# Altium PCB Audio-Module.PcbDoc
Units mm, origin at the board's own origin, x right, y up, seen from the top; angles counter-clockwise.
Board outline 29.75 x 31.25 mm, 2 copper layers (Top Layer, Bottom Layer); 8 components, 6 nets, 32 pads, 4 vias.
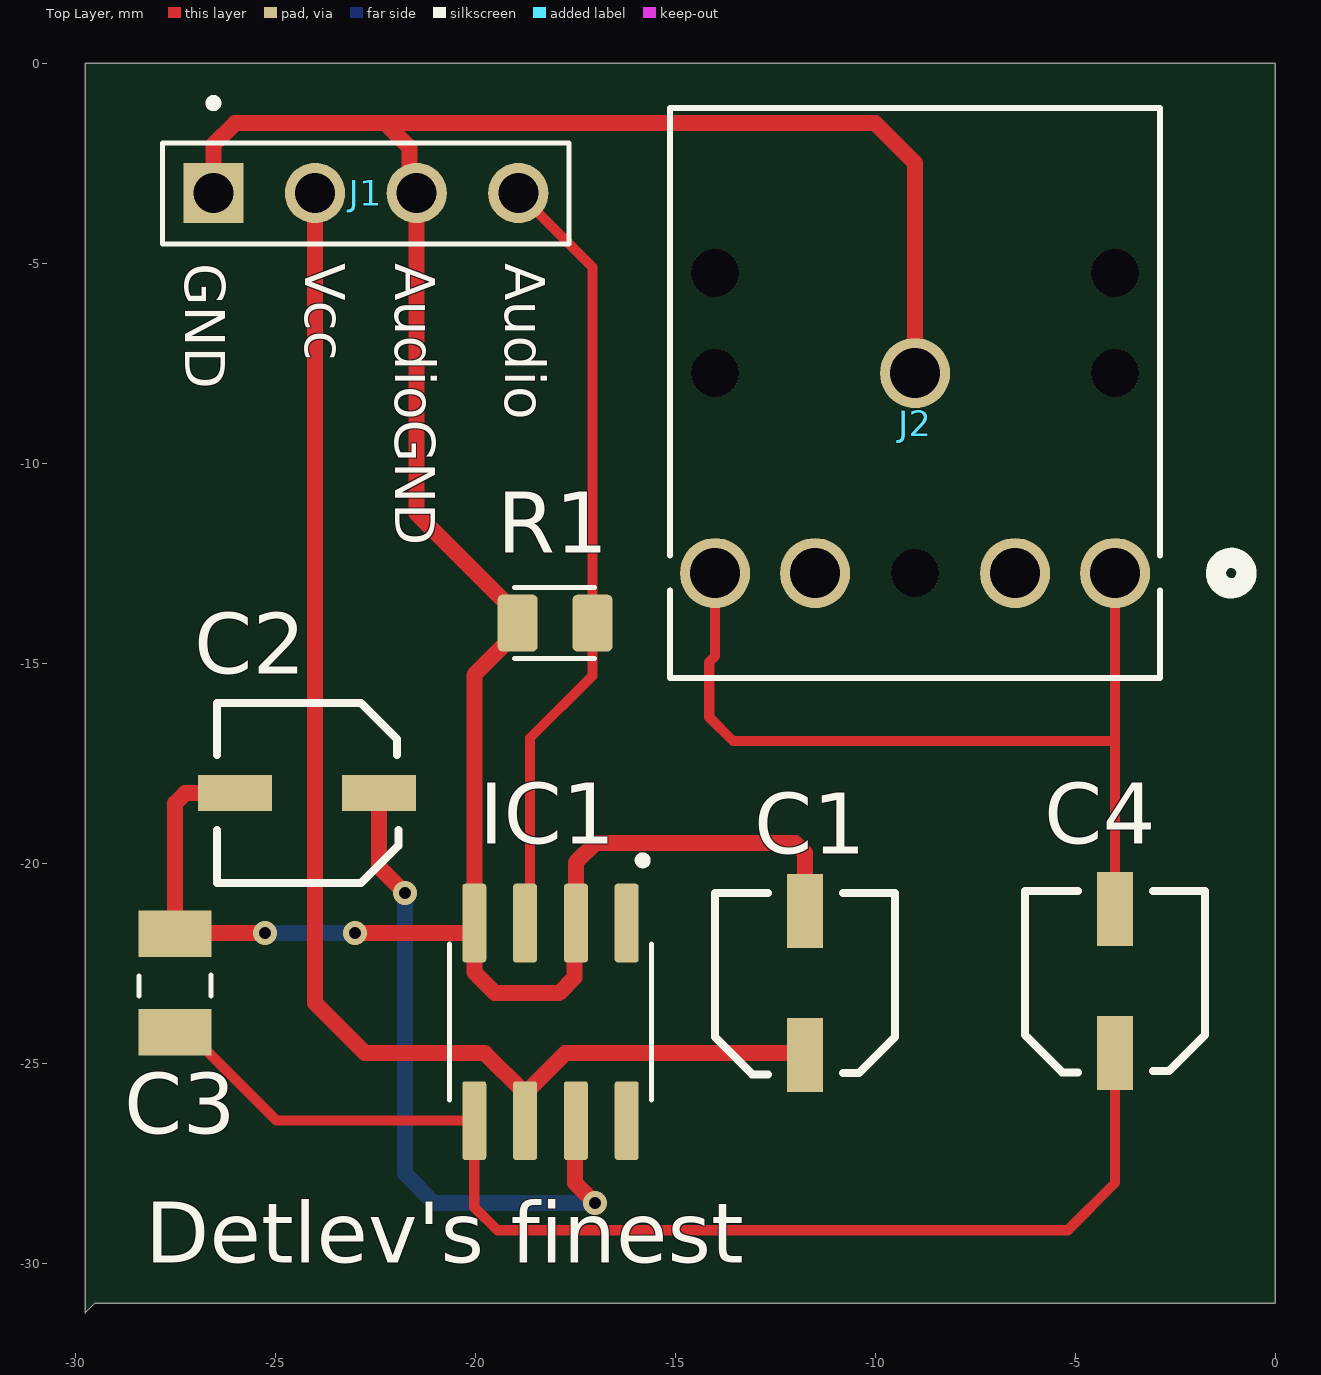
[diagram p0: Top Layer view]
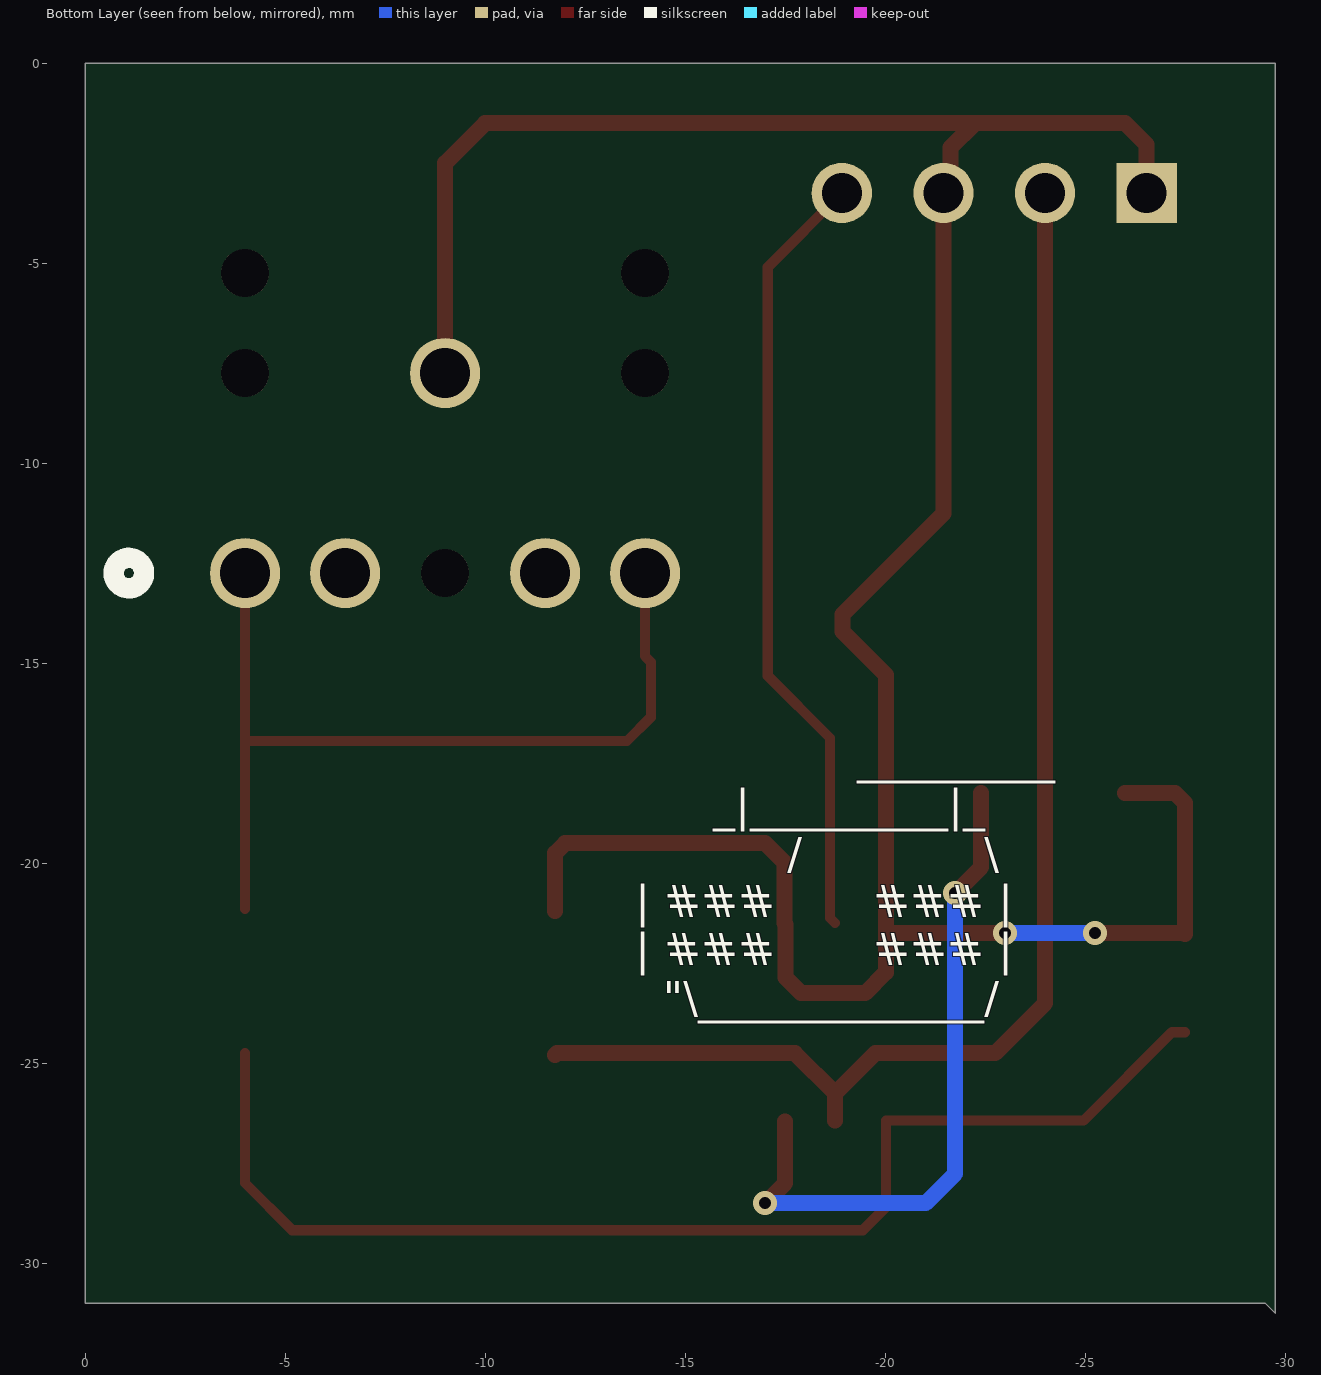
[diagram p1: Bottom Layer view, seen from below]
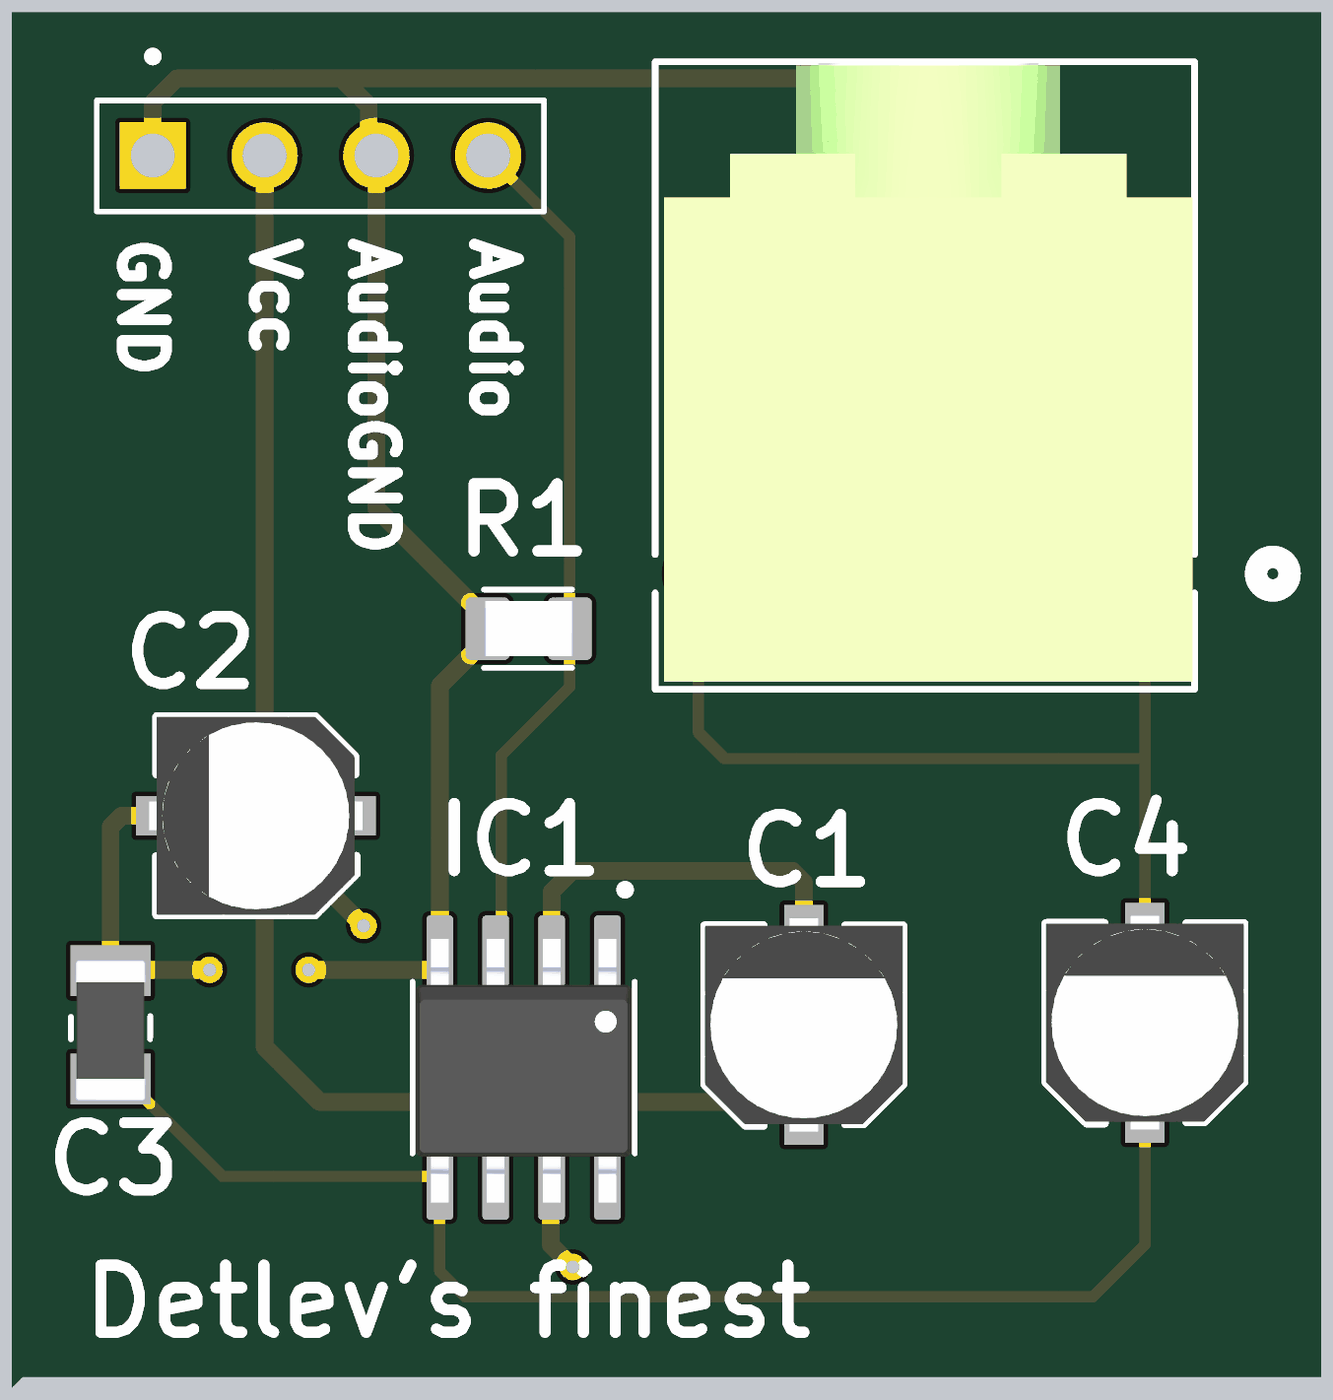
[diagram p2: 3D render of the assembled board from above, using the file's embedded part models]

## Layer stack, top to bottom
Top Solder: solder mask 0.0102, Solder Resist, Dk 3.5
Top Layer: signal copper 0.0356
Dielectric 1: dielectric 0.32, FR-4, Dk 4.8
Bottom Layer: signal copper 0.0356
Bottom Solder: solder mask 0.0102, Solder Resist, Dk 3.5

## Board outline
0,0 -29.75,0 -29.75,-31.25 -29.5,-31 0,-31

## Design rules (kind name [scope] priority, off if disabled: settings)
Clearance [All] p1: gap=0.254 ignorepadtopadclearanceinfootprint=FALSE except(0: Arc-Hole Track-Hole SMDPad-Hole THPad-Hole Via-Hole Fill-Hole Poly-Hole Region-Hole Text-Hole)
PolygonConnect [All] p1: connectstyle=Relief reliefconductorwidth=0.254 reliefentries=4 polygonreliefangle="90 Angle" airgapwidth=0.254
RoomDefinition Audio-Module-SCH [InComponentClass('Audio-Module-SCH')] p1: confinementstyle=ConfineIn formatcopy=TRUE lockcomponents=FALSE outline -29.75,-31 0,-31 0,0 -29.75,0
RoutingVias [All] p1: holewidth=0.711 width=1.27 viastyle="Through Hole" minholewidth=0.711 minwidth=1.27 maxholewidth=0.711 maxwidth=1.27
SilkToSolderMaskClearance [IsPad] p1: minsilkscreentomaskgap=0.1 clearancetoexposedcopper=TRUE
SolderMaskExpansion [All] p1: expansion=0.102 istentingtop=FALSE
Width [All] p1: maxlimit=0.5 minlimit=0.254 preferedwidth=0.254
29 further rules are at their usual default settings.

## Components (designator, comment, footprint, x,y, rotation, side; value= is the part's Value field where it differs from the comment)
C1 "100µF" ELCO -11.75,-23 r90 top
C2 "100µF" ELCO -24.2,-18.25 r180 top
C3 "100nF" "CAPACITOR 1206" -27.5,-23 r90 top
C4 "1000µF" ELCO -4,-22.95 r90 top
IC1 "LM386" "LM386 SOP8" -16.21,-21.5 r270 top
J1 "4 pin header" "4 HDR" -22.73,-3.25 r0 top
J2 "2.5mm Audio Jack" "AUDIO JACK" -4,-12.75 r180 top
R1 "10K" "RESISTOR 0805" -18,-14 r180 top

## Footprints (in the part's own frame and the unit in brackets; to place one, negate y for a bottom-side part, rotate by r counter-clockwise, add the part's x,y. Pads: shape width x height; smd on the part's side, far side on the other; paste and mask are expansions set on the pad)
"4 HDR" [mm] "1x4 pin header"
  rect 1.508x1.508 hole 1: 1(-3.81,0)
  round 1.508 hole 1: 2(-1.27,0) 3(1.27,0) 4(3.81,0)
  silkscreen extent -5.08,-1.27 5.08,2.35
"AUDIO JACK" [mil] "3.5mm audio jack"
  round 69 hole 49: 1(0,0) 2(98.43,0) 3(295.28,0) 4(393.7,0) 5(196.85,-196.85)
  round 47 hole 47 unplated mask+0: 6(196.85,0)
  round 47 hole 47 unplated: 7(0,-196.85) 8(393.7,-196.85) 9(0,-295.28) 10(393.7,-295.28)
  silkscreen extent -129,-458 438,103, body extent -42,-457 430,97, height 236
"CAPACITOR 1206" [mm] "100nF & 4.7pF"
  rect 1.16x1.82 smd: 1(-1.23,0) 2(1.23,0)
  silkscreen extent -0.32,-0.9 0.2,0.9, body extent -1.73,-0.8 1.47,0.8, height 0.85
ELCO [mm] "ELCO CAP"
  rect 1.85x0.9 smd: 1(-1.8,0) 2(1.8,0)
  silkscreen extent -2.28,-2.25 2.26,2.25, body extent -2.42,-2.25 2.42,2.25, height 6.1
"LM386 SOP8" [mm] "LM368 SOP8 package"
  rrect25% 1.97x0.6 smd: 1(0,0) 2(0,-1.27) 3(0,-2.54) 4(0,-3.81) 5(4.94,-3.81) 6(4.94,-2.54) 7(4.94,-1.27) 8(4.94,0)
  silkscreen extent -1.67,-4.43 4.42,0.62, body extent -0.46,-4.36 5.54,0.55, height 1.75
"RESISTOR 0805" [mm]
  rrect25% 1x1.42 smd: 1(-0.935,0) 2(0.935,0)
  silkscreen extent -0.98,-0.89 1.02,0.89, body extent -1,-0.63 1,0.63, height 0.6

## Part data
C1 C2: library part "Capacitor: 100µF (elco)", "CAP ALUM 100UF 20% 10V SMD", Capacitance=100uF, Case/Package=Radial, Manufacturer=Panasonic, Manufacturer Part Number=EEE-1AA101WR, Max Operating Temperature=85°C, Min Operating Temperature=-40°C, Package Quantity=1000, Ratings=AEC-Q200, Ripple Current=50mA, Supplier Part Number 1=1766372, Tolerance=20%, Voltage Rating=10V, Category="Aluminum Electrolytic Capacitors", ComponentLink1Description=https://datasheet.ciiva.com/26945/getdatasheetpartid-169213-26945071.pdf?src-supplier=Verical, ComponentLink1URL=https://datasheet.ciiva.com/26945/getdatasheetpartid-169213-26945071.pdf?src-supplier=Verical, ComponentLink2Description=https://datasheet.ciiva.com/24027/aba0000ce2-40801-24027541.pdf?src-supplier=Mouser, ComponentLink2URL=https://datasheet.ciiva.com/24027/aba0000ce2-40801-24027541.pdf?src-supplier=Mouser, ComponentLink3Description=https://datasheet.ciiva.com/14598/70255710-14598233.pdf?src-supplier=Allied+Electronics, ComponentLink3URL=https://datasheet.ciiva.com/14598/70255710-14598233.pdf?src-supplier=Allied+Electronics, ComponentLink4Description=https://datasheet.ciiva.com/14605/70255710-14605689.pdf?src-supplier=Allied+Electronics, ComponentLink4URL=https://datasheet.ciiva.com/14605/70255710-14605689.pdf?src-supplier=Allied+Electronics, ComponentLink5Description=https://datasheet.ciiva.com/11673/aba0000ce2-11673882.pdf?src-supplier=Avnet, ComponentLink5URL=https://datasheet.ciiva.com/11673/aba0000ce2-11673882.pdf?src-supplier=Avnet, ComponentLink6Description=https://datasheet.ciiva.com/16427/aba0000ce2-16427544.pdf?src-supplier=Future+Electronics, ComponentLink6URL=https://datasheet.ciiva.com/16427/aba0000ce2-16427544.pdf?src-supplier=Future+Electronics, ComponentLink7Description=https://datasheet.ciiva.com/2983/aba0000ce2-2983906.pdf?src-supplier=Avnet, ComponentLink7URL=https://datasheet.ciiva.com/2983/aba0000ce2-2983906.pdf?src-supplier=Avnet, ComponentLink8Description=https://datasheet.ciiva.com/30075/11aba0000ce2-30075303.pdf?src-supplier=Onlinecomponents.com, ComponentLink8URL=https://datasheet.ciiva.com/30075/11aba0000ce2-30075303.pdf?src-supplier=Onlinecomponents.com, Construction=Cylindrical, Contact Plating=Tin, Diameter=5mm, Height=5.4mm, Height - Seated (Max)=0.213inch, Lead Free="Lead Free", Length=5.5mm, Life (Hours)=1000Hour, Mount="Surface Mount,PCB", Packaging="Tape and Reel", Pricing 1="50=0,23400, 250=0,13800, 500=0,11000 (EUR)", Radiation Hardening=No, Ripple Current (AC)=50mA, RoHS=Yes, RoHS Compliant=Yes, Series=S, Stock 1=2900, Supplier 1=Rs, Termination=SMD/SMT, Voltage Rating (DC)=10V
C3: library part "Capacitor: 100nF", "Ceramic capacitor SMD-1206 100nF /50V X7R# K +-10%, AVX, RoHS, /4000 reel/", Case Code (Imperial)=1206, Case Code (Metric)=3216, Dielectric=X7R, Dielectric Material=Ceramic, Insulation Resistance=100GR, Manufacturer="Kyocera AVX", Manufacturer Part Number=12065C104KAT2A, Max Operating Temperature=125°C, Min Operating Temperature=-55°C, Package Quantity=1, Supplier Part Number 1=2281081, Tolerance=10%, Voltage=50V, Capacitance=100nF, Case/Package=1206, Category="Ceramic Capacitors", ComponentLink1Description=https://datasheet.ciiva.com/11786/0900766b80ed4be2-11786988.pdf?src-supplier=Rs, ComponentLink1URL=https://datasheet.ciiva.com/11786/0900766b80ed4be2-11786988.pdf?src-supplier=Rs, ComponentLink2Description=https://datasheet.ciiva.com/2988/cx7r-2988135.pdf?src-supplier=Avnet, ComponentLink2URL=https://datasheet.ciiva.com/2988/cx7r-2988135.pdf?src-supplier=Avnet, ComponentLink3Description=https://datasheet.ciiva.com/16375/cx7r-16375719.pdf?src-supplier=Future+Electronics, ComponentLink3URL=https://datasheet.ciiva.com/16375/cx7r-16375719.pdf?src-supplier=Future+Electronics, ComponentLink4Description=https://datasheet.ciiva.com/2988/cx7r-2988136.pdf?src-supplier=Avnet, ComponentLink4URL=https://datasheet.ciiva.com/2988/cx7r-2988136.pdf?src-supplier=Avnet, ComponentLink5Description=https://datasheet.ciiva.com/7833/cx7r-7833405.pdf?src-supplier=Element14, ComponentLink5URL=https://datasheet.ciiva.com/7833/cx7r-7833405.pdf?src-supplier=Element14, ComponentLink6Description=https://datasheet.ciiva.com/25796/cx7r-25796358.pdf?src-supplier=Farnell, ComponentLink6URL=https://datasheet.ciiva.com/25796/cx7r-25796358.pdf?src-supplier=Farnell, ComponentLink7Description=https://datasheet.ciiva.com/7833/cx7r-7833402.pdf?src-supplier=Element14, ComponentLink7URL=https://datasheet.ciiva.com/7833/cx7r-7833402.pdf?src-supplier=Element14, ComponentLink8Description=https://datasheet.ciiva.com/150/cx7r-150390.pdf?src-supplier=Digi-Key, ComponentLink8URL=https://datasheet.ciiva.com/150/cx7r-150390.pdf?src-supplier=Digi-Key, ComponentLink9Description=https://datasheet.ciiva.com/150/cx7r-150389.pdf?src-supplier=Digi-Key, ComponentLink9URL=https://datasheet.ciiva.com/150/cx7r-150389.pdf?src-supplier=Digi-Key, ComponentLink10Description=https://datasheet.ciiva.com/150/cx7r-150391.pdf?src-supplier=Digi-Key, ComponentLink10URL=https://datasheet.ciiva.com/150/cx7r-150391.pdf?src-supplier=Digi-Key, ComponentLink11Description=https://datasheet.ciiva.com/7833/cx7r-7833403.pdf?src-supplier=Element14, ComponentLink11URL=https://datasheet.ciiva.com/7833/cx7r-7833403.pdf?src-supplier=Element14, ComponentLink12Description=https://datasheet.ciiva.com/7833/cx7r-7833404.pdf?src-supplier=Element14, ComponentLink12URL=https://datasheet.ciiva.com/7833/cx7r-7833404.pdf?src-supplier=Element14, ComponentLink13Description=https://datasheet.ciiva.com/5415/cx7r-218113-5415909.pdf?src-supplier=Mouser, ComponentLink13URL=https://datasheet.ciiva.com/5415/cx7r-218113-5415909.pdf?src-supplier=Mouser, ComponentLink14Description=https://datasheet.ciiva.com/14584/70001075-14584956.pdf?src-supplier=Allied+Electronics, ComponentLink14URL=https://datasheet.ciiva.com/14584/70001075-14584956.pdf?src-supplier=Allied+Electronics, Construction=Flat, Contact Plating=Tin,Matte, Depth=1.6mm, Dissipation Factor=2.5%, Height=0.94mm, Lead Free="Lead Free", Length=3.2mm, Mount="Surface Mount,PCB", Number of Pins=2, Packaging="Tape and Reel", Pricing 1="4000=0,02600, 20000=0,02520, 40000=0,02440 (EUR)", Radiation Hardening=No, Reach SVHC Compliant=Yes, RoHS=Yes, RoHS Compliant=Yes, Series=-, Stock 1=188000, Supplier 1=Farnell, Termination=SMD/SMT, Thickness=0.037inch, Voltage Rating=50V, Voltage Rating (DC)=50V, Width=1.6mm
C4: library part "Capacitor: 1000µF (elco)", "Capacitor; Aluminum Electrolytic; Ecap 1000uF 25V H13 Case FK SMT", Capacitance=1mF, Case/Package=Radial, ESR (Equivalent Series Resistance)=60mR, Manufacturer=Panasonic, Manufacturer Part Number=EEE-FK1E102AQ, Max Operating Temperature=105°C, Min Operating Temperature=-55°C, Package Quantity=200, Ratings=AEC-Q200, Ripple Current=1.1A, Supplier Part Number 1=7083869P, Tolerance=20%, Voltage=25V, Category="Aluminum Electrolytic Capacitors", Construction=Cylindrical, Diameter=12.5mm, Height=13.5mm, Height - Seated (Max)=0.55inch, Impedance=60mR, Lead Free="Lead Free", Length=13.5mm, Life (Hours)=5000Hour, Mount="Surface Mount,PCB", Packaging="Tape and Reel", Polarity=Polar, Pricing 1="50=1,92800, 100=1,80600, 250=1,68200, 500=1,52800 (EUR)", Radiation Hardening=No, Reach SVHC Compliant=Yes, Ripple Current (AC)=1.1A, RoHS=Yes, RoHS Compliant=Yes, Series=FK, Stock 1=5, Supplier 1=Rs, Termination=SMD/SMT, Voltage Rating=25V, Voltage Rating (DC)=25V
IC1: library part "IC: LM386", "Audio Amplifier, 0.325W, 1 Chann", Case/Package=D, Input Bias Current=250nA, Input Offset Voltage (Vos)=2.5mV, Manufacturer="TI National Semiconductor", Manufacturer Part Number=LM386M-1, Max Operating Temperature=70°C, Max Output Power=325mW, Max Power Dissipation=730mW, Max Supply Voltage=12V, Min Operating Temperature=0°C, Min Supply Voltage=4V, Nominal Supply Current=4mA, Output Power=250mW, Package Quantity=95, Power Supply Rejection Ratio (PSRR)=50dB, Quiescent Current=8mA, Supplier Part Number 1=9488324, Voltage Gain=46dB, Amplifier Type=POWER, Bandwidth=300kHz, Category="Amplifiers - Audio", ComponentLink1Description=https://datasheet.ciiva.com/14667/0900766b800333d0-14667266.pdf?src-supplier=Rs, ComponentLink1URL=https://datasheet.ciiva.com/14667/0900766b800333d0-14667266.pdf?src-supplier=Rs, ComponentLink2Description=https://datasheet.ciiva.com/1480/1640767-1480992.pdf?src-supplier=Element14, ComponentLink2URL=https://datasheet.ciiva.com/1480/1640767-1480992.pdf?src-supplier=Element14, ComponentLink3Description=https://datasheet.ciiva.com/1482/1640767-1482305.pdf?src-supplier=Element14, ComponentLink3URL=https://datasheet.ciiva.com/1482/1640767-1482305.pdf?src-supplier=Element14, ComponentLink4Description=https://datasheet.ciiva.com/2967/lm386-2967890.pdf?src-supplier=Avnet, ComponentLink4URL=https://datasheet.ciiva.com/2967/lm386-2967890.pdf?src-supplier=Avnet, Height=1.45mm, Lead Free="Contains Lead", Length=4.9mm, Load Impedance=8R, Number of Amplifiers=1, Number of Channels=1, Number of Pins=8, Packaging=Rail/Tube, Power Dissipation=730mW, Pricing 1="1=0,75500, 50=0,66000, 100=0,50700, 250=0,47800, 500=0,44800, 1000=0,35400, 2500=0,34700, 5000=0,34000 (EUR)", Reach SVHC Compliant=Yes, RoHS=No, RoHS Compliant=No, Series=-, Supplier 1=Farnell, Supply Type=Single, Termination=SMD/SMT, Unity Gain Bandwidth Product=300kHz, Weight=0.006lb, Width=3.9mm
J1: library part "CONNECTOR: 4 pin header", "Male 4 pin header"
J2: library part "Connector: Audio Jack", "Conn Audio RCP 6 POS Solder RA SMD 6 Terminal 1 Port T/R", Color=Black, Manufacturer=Kycon, Manufacturer Part Number=STX-25427-6N-TR, Package Quantity=1250, Supplier Part Number 1=806-STX-25427-6N-TR, Voltage Rating=250V, Category=Connectors, ComponentLink1Description=https://datasheet.ciiva.com/5054/stx25427-181552-5054121.pdf?src-supplier=Mouser, ComponentLink1URL=https://datasheet.ciiva.com/5054/stx25427-181552-5054121.pdf?src-supplier=Mouser, Contact Material="Copper Alloy", Contact Plating=Gold, Gender=Female, Mount="Surface Mount", Number of Contacts=6, Orientation=Horizontal, Packaging="Tape and Reel", Pricing 1="1=1,84000, 10=1,50000, 50=1,50000, 100=1,43000, 1000=1,19000, 10000=0,90300 (USD)", Radiation Hardening=No, RoHS=Yes, RoHS Compliant=Yes, Series=STX-25427, Stock 1=623, Supplier 1=Mouser, Termination=SMD/SMT
R1: library part "Resistor: 10K R", "Res Thick Film 0805 10K Ohm 5% 1/8W ±200ppm/°C Molded SMD SMD Paper T/R", Case Code (Imperial)=0805, Case Code (Metric)=2012, Manufacturer="Vishay Dale", Manufacturer Part Number=CRCW080510K0JNEB, Max Operating Temperature=155°C, Max Power Dissipation=125mW, Min Operating Temperature=-55°C, Package Quantity=10000, Resistance=10kR, Resistance Tolerance=5%, Resistor Type="Thick Film", Temperature Coefficient=200ppm/°C, Voltage Rating=150V, Case/Package=0805, Category="Chip SMD Resistors", ComponentLink1Description=https://datasheet.ciiva.com/16199/dcrcwe3-16199191.pdf?src-supplier=Future+Electronics, ComponentLink1URL=https://datasheet.ciiva.com/16199/dcrcwe3-16199191.pdf?src-supplier=Future+Electronics, ComponentLink2Description=https://datasheet.ciiva.com/7725/dcrcwe3-7725772.pdf?src-supplier=Element14, ComponentLink2URL=https://datasheet.ciiva.com/7725/dcrcwe3-7725772.pdf?src-supplier=Element14, ComponentLink3Description=https://datasheet.ciiva.com/3258/dcrcwe3-3258030.pdf?src-supplier=Avnet, ComponentLink3URL=https://datasheet.ciiva.com/3258/dcrcwe3-3258030.pdf?src-supplier=Avnet, Construction=Rectangular, Contact Plating=Tin, Depth=1.25mm, Features="Automotive AEC-Q200", Height=0.02inch, Lead Free="Lead Free", Length=0.079inch, Military Standard=Not, Number of Terminations=2, Packaging="Tape and Reel", Power Rating=125mW, Pricing 1="10000=0,02220, 20000=0,02100, 40000=0,01980, 60000=0,01860, 80000=0,01740, 100000=0,01620, 1000000=0,01500 (USD)", Radiation Hardening=No, RoHS=Yes, RoHS Compliant=Yes, Series=CRCW, Stock 1=90000, Supplier 1=Avnet, Supplier Part Number 1=CRCW080510K0JNEB, Technology="THICK FILM", Termination=SMD/SMT, Tolerance=5%, Voltage Rating (DC)=150V, Weight=0.000194oz, Width=1.25mm, Working Voltage=150V

## Via types
v1: diameter 0.6, hole 0.3, Top Layer to Bottom Layer, 4 vias

## Nets (pads, with @x,y where several pads share a name; then routed paths per layer and width w, separated by ;. In a path a pad name is that pad's centre, name@x,y a point inside that pad or via, vN(x,y) a via of type N, cw(c..) or ccw(c..) an arc to the next point about the centre after c; other vN are vias at no path point)
GND: C1.2 C2.2 C3.2 IC1.2 IC1.4 J1.1 J1.3 J2.5 R1.2 | length 73.4
  Top Layer w0.254: IC1.4@-20.193,-21.75 -20.02,-21.577 IC1.4
  Top Layer w0.4: J1.1 -26.54,-2.04 -26,-1.5 -22.25,-1.5 ; C2.2 -27.25,-18.25 -27.5,-18.5 C3.2 -27.48,-21.75 v1(-25.25,-21.75) ; v1(-23,-21.75) IC1.4@-20.193,-21.75 ; IC1.4@-20.02,-21.577 -20.02,-22.73 -19.5,-23.25 -17.899,-23.25 -17.515,-22.866 -17.515,-21.535 IC1.2 -17.48,-19.98 -17,-19.5 -12,-19.5 -11.75,-19.75 C1.2 ; IC1.4 -20.02,-15.295 -18.935,-14.21 R1.2 -18.935,-13.79 -21.46,-11.265 J1.3 -21.635,-3.075 -21.635,-2.115 -22.25,-1.5 ; J2.5 -9,-2.5 -10,-1.5 -22.25,-1.5
  Bottom Layer w0.4: v1(-25.25,-21.75) v1(-23,-21.75)
NetC1_1: C1.1 IC1.6 J1.2 | length 34.6
  Top Layer w0.4: J1.2 -24,-23.5 -22.75,-24.75 -19.755,-24.75 IC1.6@-18.75,-25.755 ; IC1.6 IC1.6@-18.75,-25.755 ; C1.1 -11.8,-24.75 -17.745,-24.75 IC1.6@-18.75,-25.755
NetC2_1: C2.1 IC1.7 | length 17.1
  Top Layer w0.254: IC1.7@-17.499,-26.459 IC1.7
  Top Layer w0.4: C2.1 -22.4,-20.1 v1(-21.75,-20.75) ; IC1.7@-17.499,-26.459 -17.499,-28.001 v1(-17,-28.5)
  Bottom Layer w0.4: v1(-21.75,-20.75) -21.75,-27.766 -21.016,-28.5 v1(-17,-28.5)
NetC3_1: C3.1 C4.1 IC1.5 | length 30.6
  Top Layer w0.254: C3.1 -27.17,-24.23 -24.96,-26.44 IC1.5 -20.02,-28.601 -19.44,-29.181 -5.181,-29.181 -4,-28 C4.1
NetC4_2: C4.2 J2.1 J2.4 | length 22.5
  Top Layer w0.254: J2.4 -14,-14.826 -14.145,-14.971 -14.145,-16.355 -13.55,-16.95 -4,-16.95 ; C4.2 -4,-16.95 ; J2.1 -4,-16.95
NetIC1_3: IC1.3 J1.4 R1.1 | length 19.7
  Top Layer w0.254: J1.4 -17.065,-5.105 R1.1 -17.065,-15.315 -18.625,-16.875 -18.625,-21.375 IC1.3
pads on no net: IC1.1 IC1.8 J2.2 J2.3 J2.6 J2.7 J2.8 J2.9 J2.10

## Silkscreen, mask and mechanical layers (free items; w line width, h text height)
Top Overlay:
  text "GND" at -27.246,-5.004 h1 r270
  text "Vcc" at -24.246,-5.004 h1 r270
  text "AudioGND" at -21.996,-5.004 h1 r270
  text "Audio" at -19.246,-5.004 h1 r270
  text "Detlev's finest" at -28.246,-29.996 h1.52
Bottom Overlay:
  text "_________ /      _|_________|_ /     /             \ /    | ###       ### | /    | ###       ### | /     \_____________/\"" at -24.25,-23.75 h0.8
Board Outline:
  lines w0.2: -29.75,-31 -29.75,0 0,0 0,-31 -29.75,-31